# EAGLE board relay (EAGLE 9.6.0)

Size 100 x 80 mm. Coordinates in mm from the lower left corner, seen from the top.
Outline: 0,0 100,0 100,80 0,80 0,0
Copper layers (1*16): Top 0.035mm / dielectric 1.5mm / Bottom 0.035mm
Design rules "default": minimum track width 6mil, minimum drill 0.35mm, track to track 6mil, track to pad 6mil, pad to pad 6mil, via to via 6mil, smd to smd 6mil, copper to edge 40mil, drill to drill 6mil, minimum pad ring 10mil, minimum via ring 8mil, stop-mask expansion 4mil, vias tented up to drill 0mil, thermal gap 10mil

## Footprints (pad centres in the part's own frame; a part is rotated, then mirrored left to right if it is on the bottom)
C0805 = smd 1.3 x 1.5: 1 -0.95,0; 2 0.95,0
C050-025X075 = drill 0.813 octagon: 1 -2.54,0; 2 2.54,0
DO35-10 = drill 0.813 long: A 5.08,0; C -5.08,0
SMA-DIODE = smd 1.27 x 1.47: A -2.15,0; C 2.15,0
TO92- = drill 0.813 octagon: 1 -2.54,0; 2 0,0; 3 2.54,0
1X03 = drill 1.016 long: 1 -2.54,0; 2 0,0; 3 2.54,0
2X04 = drill 1.016 pad 1.676 octagon: 1 -3.81,-1.27; 2 -3.81,1.27; 3 -1.27,-1.27; 4 -1.27,1.27; 5 1.27,-1.27; 6 1.27,1.27; 7 3.81,-1.27; 8 3.81,1.27
1X06 = drill 1.016 long: 1 -6.35,0; 2 -3.81,0; 3 -1.27,0; 4 1.27,0; 5 3.81,0; 6 6.35,0
CQ1 = drill 1.5: 1 4.5,-5; 2 4.5,5; C 7,0; NC -5.7,-5; NO -5.7,5
DR74 = smd 2.5 x 3.25: 1 -3,0; 2 3,0
SPARKFUN_0805 = smd 0.8 x 1.2: 1 -0.9,0; 2 0.9,0
SOT95P240X120-3N = smd 1 x 1.4: 1 -0.95,-1.1; 2 0.95,-1.1; 3 0,1.1
M2012 = smd 1.3 x 1.6: 1 -0.95,0; 2 0.95,0
EB2209A = drill 1.321 pad 2.54 octagon: + 7.493,0; - -7.493,0
ESP8266-ESP12E = smd 2 x 1.2: 1 -7.62,5.84; 2 -7.62,3.84; 3 -7.62,1.84; 4 -7.62,-0.16; 5 -7.62,-2.16; 6 -7.62,-4.16; 7 -7.62,-6.16; 8 -7.62,-8.16; 9 8.58,-8.16; 10 8.58,-6.16; 11 8.58,-4.16; 12 8.58,-2.16; 13 8.58,-0.16; 14 8.58,1.84; 15 8.58,3.84; 16 8.58,5.84 | smd 1.2 x 2: 17 -4.62,-10.16; 18 -2.62,-10.16; 19 -0.62,-10.16; 20 1.38,-10.16; 21 3.38,-10.16; 22 5.38,-10.16
LED3MM = drill 0.813 octagon: A -1.27,0; K 1.27,0
SOT23 = smd 1 x 1.4: 1 -0.95,-1.1; 2 0.95,-1.1; 3 0,1.1
TP20SQ = smd 2 x 2: TP 0,0
MSOP8 = smd 0.45 x 1: AGND -0.975,2.05; BOOST -0.325,2.05; EN 0.325,-2.05; PGND 0.975,2.05; SW 0.325,2.05; VCC -0.325,-2.05; VFB -0.975,-2.05; VIN 0.975,-2.05
DBCONN-1X2 = drill 1 pad 2 octagon: P0 -2.54,0; P1 2.46,0

## Placement (x,y rotation side)
C1  10uF  [C0805]  -68.58,49.53 0 top  (outside the outline)
C2  100nF  [C0805]  -66.04,40.64 0 top  (outside the outline)
C3  [C050-025X075]  -64.77,60.96 0 top  (outside the outline)
C4  100nF  [C0805]  -17.78,49.53 0 top  (outside the outline)
C5  10uF  [C0805]  -16.51,55.88 0 top  (outside the outline)
C6  100nF  [C0805]  -24.13,49.53 0 top  (outside the outline)
C11  100nF  [C0805]  -30.48,49.53 0 top  (outside the outline)
C13  10uF  [C0805]  -22.86,55.88 0 top  (outside the outline)
C14  100nF  [C0805]  -36.83,49.53 0 top  (outside the outline)
C15  10uF  [C0805]  -29.21,55.88 0 top  (outside the outline)
C16  10uF  [C0805]  -35.56,55.88 0 top  (outside the outline)
C17  100nF  [C0805]  -43.18,49.53 0 top  (outside the outline)
C18  100nF  [C0805]  -49.53,49.53 0 top  (outside the outline)
C19  10uF  [C0805]  -41.91,55.88 0 top  (outside the outline)
C21  100nF  [C0805]  -55.88,49.53 0 top  (outside the outline)
C22  10uF  [C0805]  -48.26,55.88 0 top  (outside the outline)
C23  100nF  [C0805]  -62.23,49.53 0 top  (outside the outline)
D1  1N4446  [DO35-10]  -54.61,41.91 0 top  (outside the outline)
D3  1A/40V/500mV  [SMA-DIODE]  -57.15,62.23 0 top  (outside the outline)
IC2  DS18B20  [TO92-]  -36.83,30.48 0 top  (outside the outline)
JP1  [1X03]  -48.26,60.96 0 top  (outside the outline)
JP2  [2X04]  -19.05,40.64 0 top  (outside the outline)
JP3  [1X06]  -35.56,60.96 0 top  (outside the outline)
K2  CQ1-12V  [CQ1]  -63.5,7.62 0 top  (outside the outline)
L1  15uH  [DR74]  -17.78,31.75 0 top  (outside the outline)
NC1  [SPARKFUN_0805]  -26.67,72.39 0 top  (outside the outline)
Q1A  MMBT3904  [SOT95P240X120-3N]  -36.83,41.91 0 top  (outside the outline)
Q1B  MMBT3904  [SOT95P240X120-3N]  -44.45,41.91 0 top  (outside the outline)
R1  10k  [SPARKFUN_0805]  -55.88,67.31 0 top  (outside the outline)
R2  10K  [M2012]  -68.58,55.88 0 top  (outside the outline)
R3  10k  [SPARKFUN_0805]  -59.69,67.31 0 top  (outside the outline)
R4  10k  [SPARKFUN_0805]  -63.5,67.31 0 top  (outside the outline)
R5  10K  [M2012]  -15.24,62.23 0 top  (outside the outline)
R6  10k  [SPARKFUN_0805]  -67.31,67.31 0 top  (outside the outline)
R7  10k  [SPARKFUN_0805]  -71.12,67.31 0 top  (outside the outline)
R8  1K  [M2012]  -25.4,62.23 0 top  (outside the outline)
R9  4.7K  [M2012]  -53.34,55.88 0 top  (outside the outline)
R10  10K  [M2012]  -58.42,55.88 0 top  (outside the outline)
R11  10K  [M2012]  -20.32,62.23 0 top  (outside the outline)
R12  10K  [M2012]  -63.5,55.88 0 top  (outside the outline)
R14  470  [SPARKFUN_0805]  -15.24,73.66 0 top  (outside the outline)
R15  4k7  [SPARKFUN_0805]  -19.05,73.66 0 top  (outside the outline)
R16  1k5  [SPARKFUN_0805]  -22.86,73.66 0 top  (outside the outline)
SG4  EB2209A  [EB2209A]  -43.18,11.43 0 top  (outside the outline)
SJR2  [ESP8266-ESP12E]  -22.86,11.43 0 top  (outside the outline)
STATE_LED  [LED3MM]  -52.07,68.58 0 top  (outside the outline)
T1  BC847  [SOT23]  -29.21,41.91 0 top  (outside the outline)
TP1  TPTP20SQ  [TP20SQ]  -72.39,60.96 0 top  (outside the outline)
TP2  TPTP20SQ  [TP20SQ]  -16.51,67.31 0 top  (outside the outline)
TP3  TPTP20SQ  [TP20SQ]  -21.59,67.31 0 top  (outside the outline)
TP4  TPTP20SQ  [TP20SQ]  -26.67,67.31 0 top  (outside the outline)
TP5  TPTP20SQ  [TP20SQ]  -31.75,67.31 0 top  (outside the outline)
TP6  TPTP20SQ  [TP20SQ]  -36.83,67.31 0 top  (outside the outline)
U3  MCP16311  [MSOP8]  -43.18,29.21 0 top  (outside the outline)
U$1  DBCONN-1X2  [DBCONN-1X2]  -52.07,30.48 0 top  (outside the outline)
U$2  DBCONN-1X2  [DBCONN-1X2]  -62.23,30.48 0 top  (outside the outline)

## Library data of the parts
C1-C6 C11 C13-C19 C21-C23 = rcl; SPICEPREFIX: C
D1 = diode
D3 = SparkFun-DiscreteSemi; PROD_ID: DIO-08053
IC2 = 1wire
JP1 JP3 = pinhead
JP2 = adafruit
K2 = relay; OC_FARNELL: unknown; OC_NEWARK: unknown
L1 = inductors; SPICEPREFIX: L
NC1 R1 R3 R4 R6 R7 R14-R16 = antduino
Q1A Q1B = MMBT3904; AVAILABILITY: Unavailable; DESCRIPTION: Bipolar _BJT_ Transistor NPN 40V 200mA 270MHz 350mW Surface Mount SOT-23-3; MF: STMicroelectronics; MP: MMBT3904; PACKAGE: SOT-23-3 Taiwan Semiconductor; PRICE: None
R2 R5 R8-R12 = rcl; SPICEPREFIX: R
SG4 = buzzer; OC_FARNELL: unknown; OC_NEWARK: unknown
SJR2 = esp12e
STATE_LED = led
T1 = transistor
TP1-TP6 = testpad
U3 = microchip
U$1 U$2 = Terminal Block Connector

## Nets
ADC: R11.2 R12.2 SJR2.2
C: JP1.2 K2.C
DS18B20: IC2.2 SJR2.4
DTR: JP3.4 Q1A.2 R6.2
GND: C1.2 C2.2 C3.2 C4.2 C5.2 C6.1 C11.1 C13.1 C14.1 C15.1 C16.1 C17.1 C19.1 C21.2 C22.1 C23.2 IC2.1 JP2.1 JP3.6 R9.1 R12.1 R16.1 SJR2.9 T1.2 TP6.TP U3.AGND U3.PGND U$1.P1
N$1: R8.2 R9.2 T1.1
N$2: Q1A.1 R4.1
N$3: NC1.1 U3.VFB
N$4: R14.2 STATE_LED.A
N$5: D1.A K2.2 SG4.- T1.3
N$6: Q1B.1 R6.1
N$11: R5.1 U$2.P1
N$12: R11.1 U$2.P0
N$24: C18.2 L1.2 U3.SW
N$25: C18.1 U3.BOOST
N$27: C19.2 U3.VCC
N$28: R15.1 R16.2
N$30: R10.1 SJR2.3
NC: JP1.1 K2.NC
NO: JP1.3 K2.NO
PROG_IR_TR: Q1A.3 R2.1 R3.1 SJR2.12 TP4.TP
RELAY_DATA: R8.1 SJR2.14
RESET: C6.2 C11.2 Q1B.3 R1.2 R7.1 SJR2.1 TP5.TP
RF_CE: JP2.3 SJR2.10
RF_CSN: JP2.4 SJR2.11
RF_IRQ: JP2.8
RF_MISO: JP2.7 SJR2.6
RF_MOSI: JP2.6 SJR2.7
RF_SCK: JP2.5 SJR2.5
RTS: JP3.5 Q1B.2 R4.2
RXD: JP3.2 SJR2.15 TP2.TP
RXD1: SJR2.13 STATE_LED.K
TXD: JP3.3 SJR2.16 TP3.TP
VCC: C1.1 C2.1 C4.1 C5.1 C13.2 C14.2 C15.2 C21.1 C22.2 C23.1 IC2.3 JP2.2 L1.1 NC1.2 R1.1 R2.2 R3.2 R5.2 R7.2 R10.2 R14.1 R15.2 SJR2.8
VIN: D3.A JP3.1 TP1.TP U$1.P0
VRELAY: C3.1 C16.2 C17.2 D1.C D3.C K2.1 SG4.+ U3.EN U3.VIN

## Tracks (layer width: path | path; a pad name or v marks a point on that pad's centre or on a via)
ADC  (2 unrouted)
C  (1 unrouted)
DS18B20  (1 unrouted)
DTR  (2 unrouted)
GND  (27 unrouted)
N$1  (2 unrouted)
N$2  (1 unrouted)
N$3  (1 unrouted)
N$4  (1 unrouted)
N$5  (3 unrouted)
N$6  (1 unrouted)
N$11  (1 unrouted)
N$12  (1 unrouted)
N$24  (2 unrouted)
N$25  (1 unrouted)
N$27  (1 unrouted)
N$28  (1 unrouted)
N$30  (1 unrouted)
NC  (1 unrouted)
NO  (1 unrouted)
PROG_IR_TR  (4 unrouted)
RELAY_DATA  (1 unrouted)
RESET  (6 unrouted)
RF_CE  (1 unrouted)
RF_CSN  (1 unrouted)
RF_MISO  (1 unrouted)
RF_MOSI  (1 unrouted)
RF_SCK  (1 unrouted)
RTS  (2 unrouted)
RXD  (2 unrouted)
RXD1  (1 unrouted)
TXD  (2 unrouted)
VCC  (22 unrouted)
VIN  (3 unrouted)
VRELAY  (8 unrouted)